# Altium PCB PCB.PcbDoc
Units mm, origin at the board's own origin, x right, y up, seen from the top; angles counter-clockwise.
Board outline 7.97 x 5.2 mm, 2 copper layers (Top Layer, Bottom Layer); 1 components, 4 nets, 8 pads, 0 vias.
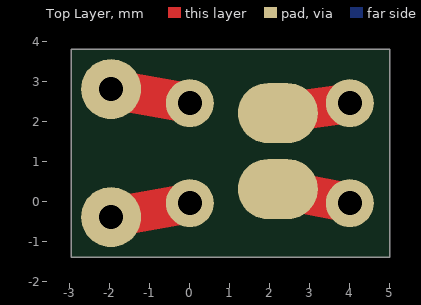
[diagram p0: Top Layer view]
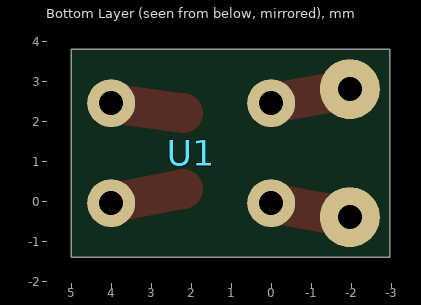
[diagram p1: Bottom Layer view, seen from below]

## Layer stack, top to bottom
Top Solder: solder mask 0.0102, Solder Resist, Dk 3.5
Top Layer: signal copper 0.0356
Dielectric 1: dielectric 0.32, FR-4, Dk 4.8
Bottom Layer: signal copper 0.0356
Bottom Solder: solder mask 0.0102, Solder Resist, Dk 3.5

## Board outline
-2.969,-1.4 5,-1.4 5,3.8 -2.969,3.8

## Design rules (kind name [scope] priority, off if disabled: settings)
Clearance [All] p1: gap=0.254 ignorepadtopadclearanceinfootprint=FALSE except(0: Arc-Hole Track-Hole SMDPad-Hole THPad-Hole Via-Hole Fill-Hole Poly-Hole Region-Hole Text-Hole)
PolygonConnect [All] p1: connectstyle=Relief reliefconductorwidth=0.254 reliefentries=4 polygonreliefangle="90 Angle" airgapwidth=0.254
RoutingVias [All] p1: holewidth=0.711 width=1.27 viastyle="Through Hole" minholewidth=0.711 minwidth=1.27 maxholewidth=0.711 maxwidth=1.27
SolderMaskExpansion [All] p1: expansion=0.102 istentingtop=FALSE
Width [All] p1: maxlimit=10 minlimit=0.254 preferedwidth=0.254
30 further rules are at their usual default settings.

## Components (designator, comment, footprint, x,y, rotation, side; value= is the part's Value field where it differs from the comment)
U1 "EESX1103" EESX1103 4,-0.05 r180 bottom

## Footprints (in the part's own frame and the unit in brackets; to place one, negate y for a bottom-side part, rotate by r counter-clockwise, add the part's x,y. Pads: shape width x height; smd on the part's side, far side on the other; paste and mask are expansions set on the pad)
EESX1103 [mm]
  round 1.2 hole 0.6: 1(0,2.5) 2(0,0) 3(4,0) 4(4,2.5)
  body extent -0.5,-0.85 4.5,3.35, height 5.2

## Free pads (board coordinates)
  round 1.5 hole 0.6: 2(-1.969,-0.4) 2(-1.969,2.8)
  oval 2x1.5 smd: 3(2.2,0.3) 3(2.2,2.2)

## Nets (pads, with @x,y where several pads share a name; then routed paths per layer and width w, separated by ;. In a path a pad name is that pad's centre, name@x,y a point inside that pad or via, vN(x,y) a via of type N, cw(c..) or ccw(c..) an arc to the next point about the centre after c; other vN are vias at no path point)
+5V: pad.3@2.2,2.2 U1.1 | length 1.8
  Top Layer w1: pad.3@2.2,2.2 U1.1
GND: pad.3@2.2,0.3 U1.2 | length 1.8
  Top Layer w1: pad.3@2.2,0.3 U1.2
OUT: pad.2@-1.969,2.8 U1.4 | length 2
  Top Layer w1: pad.2@-1.969,2.8 U1.4
OUT2: pad.2@-1.969,-0.4 U1.3 | length 2
  Top Layer w1: pad.2@-1.969,-0.4 U1.3

## Silkscreen, mask and mechanical layers (free items; w line width, h text height)
Mechanical 14:
  the board outline again, w0.254